# Altium PCB PCB_2021-06-30.pcbdoc
Units mil, origin at the board's own origin, x right, y up, seen from the top; angles counter-clockwise.
Board outline 3381.1 x 2940 mil, 2 copper layers (Top Layer, Bottom Layer); 30 components, 25 nets, 123 pads, 121 vias.
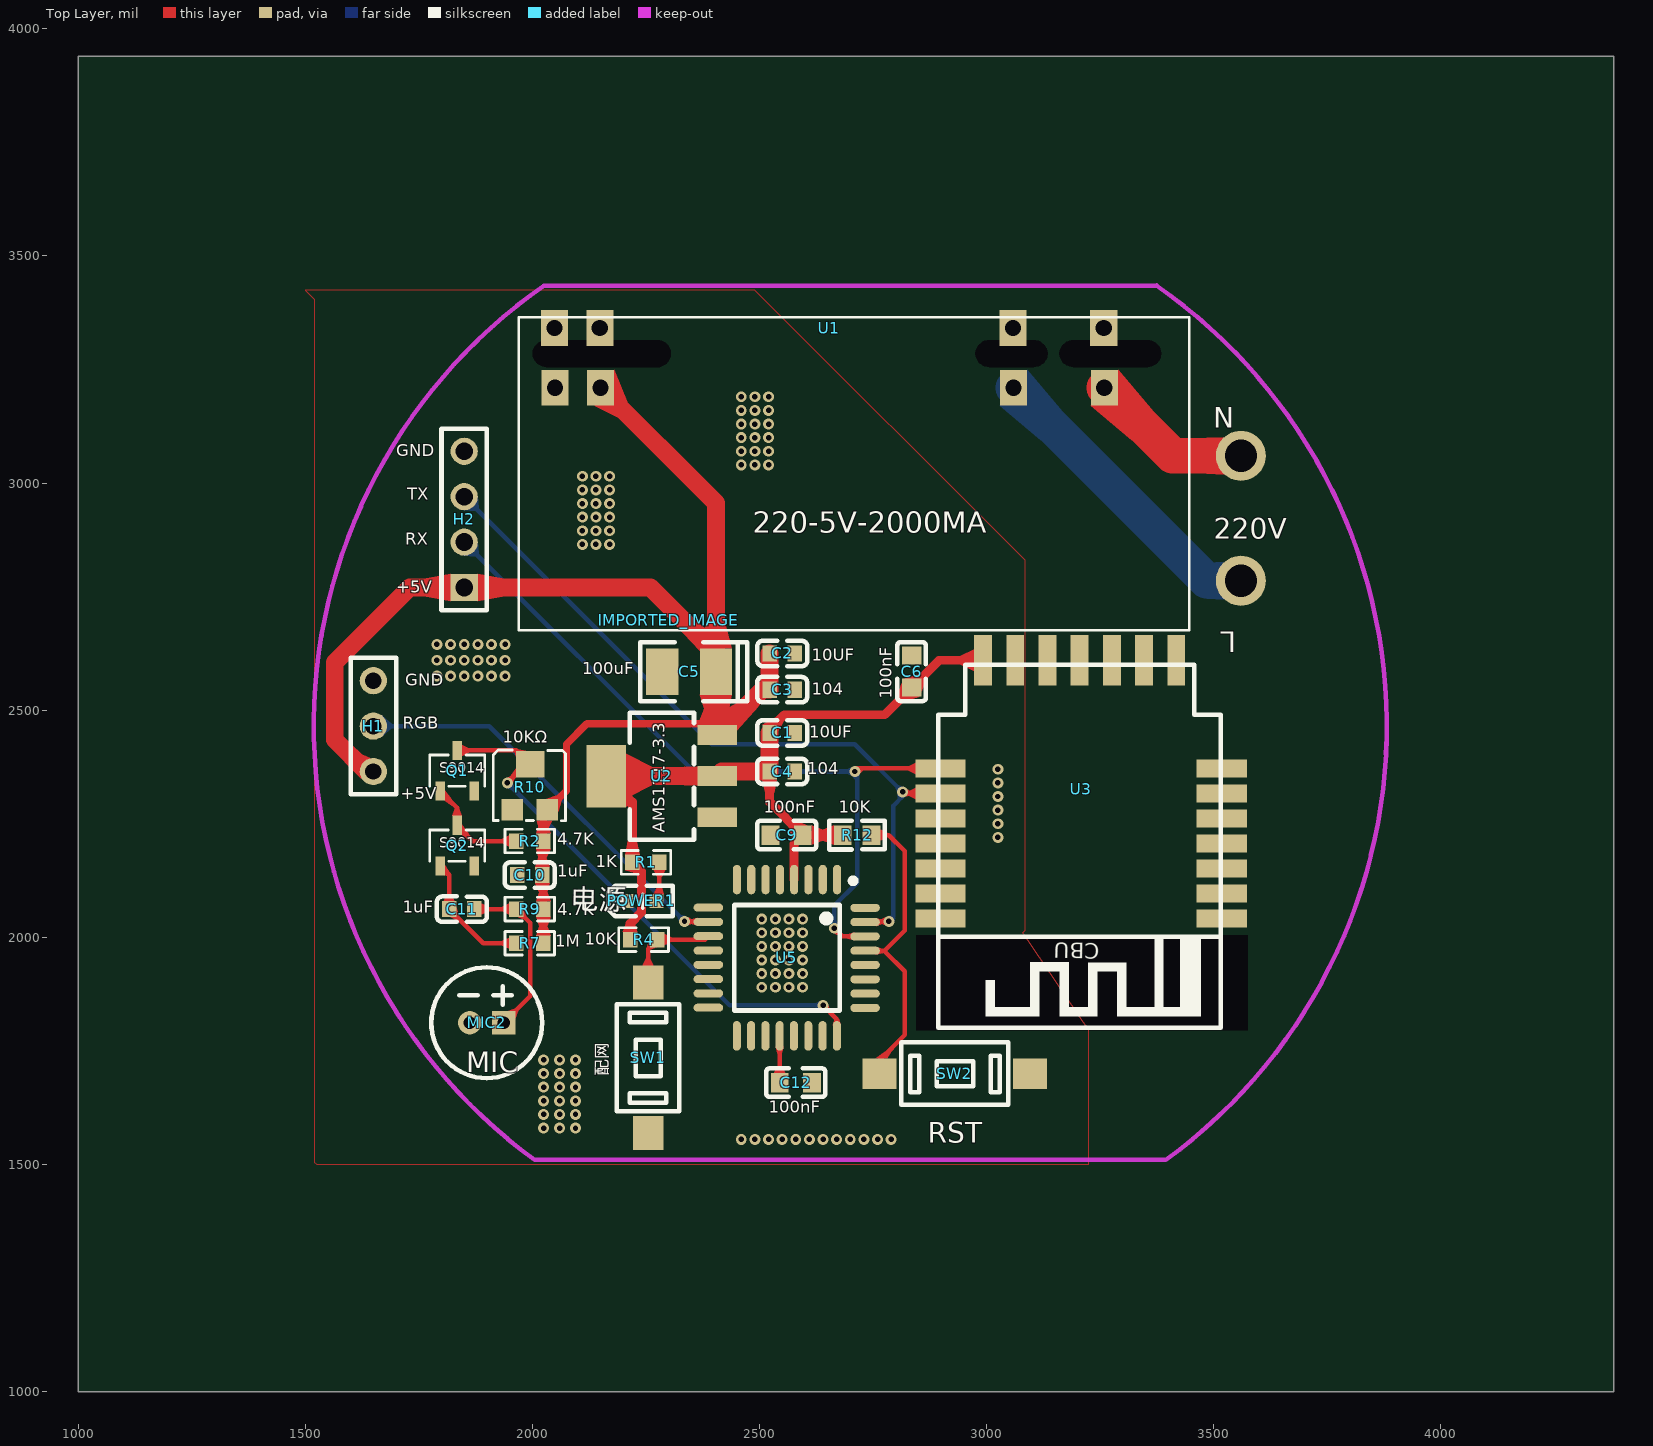
[diagram p0: Top Layer view]
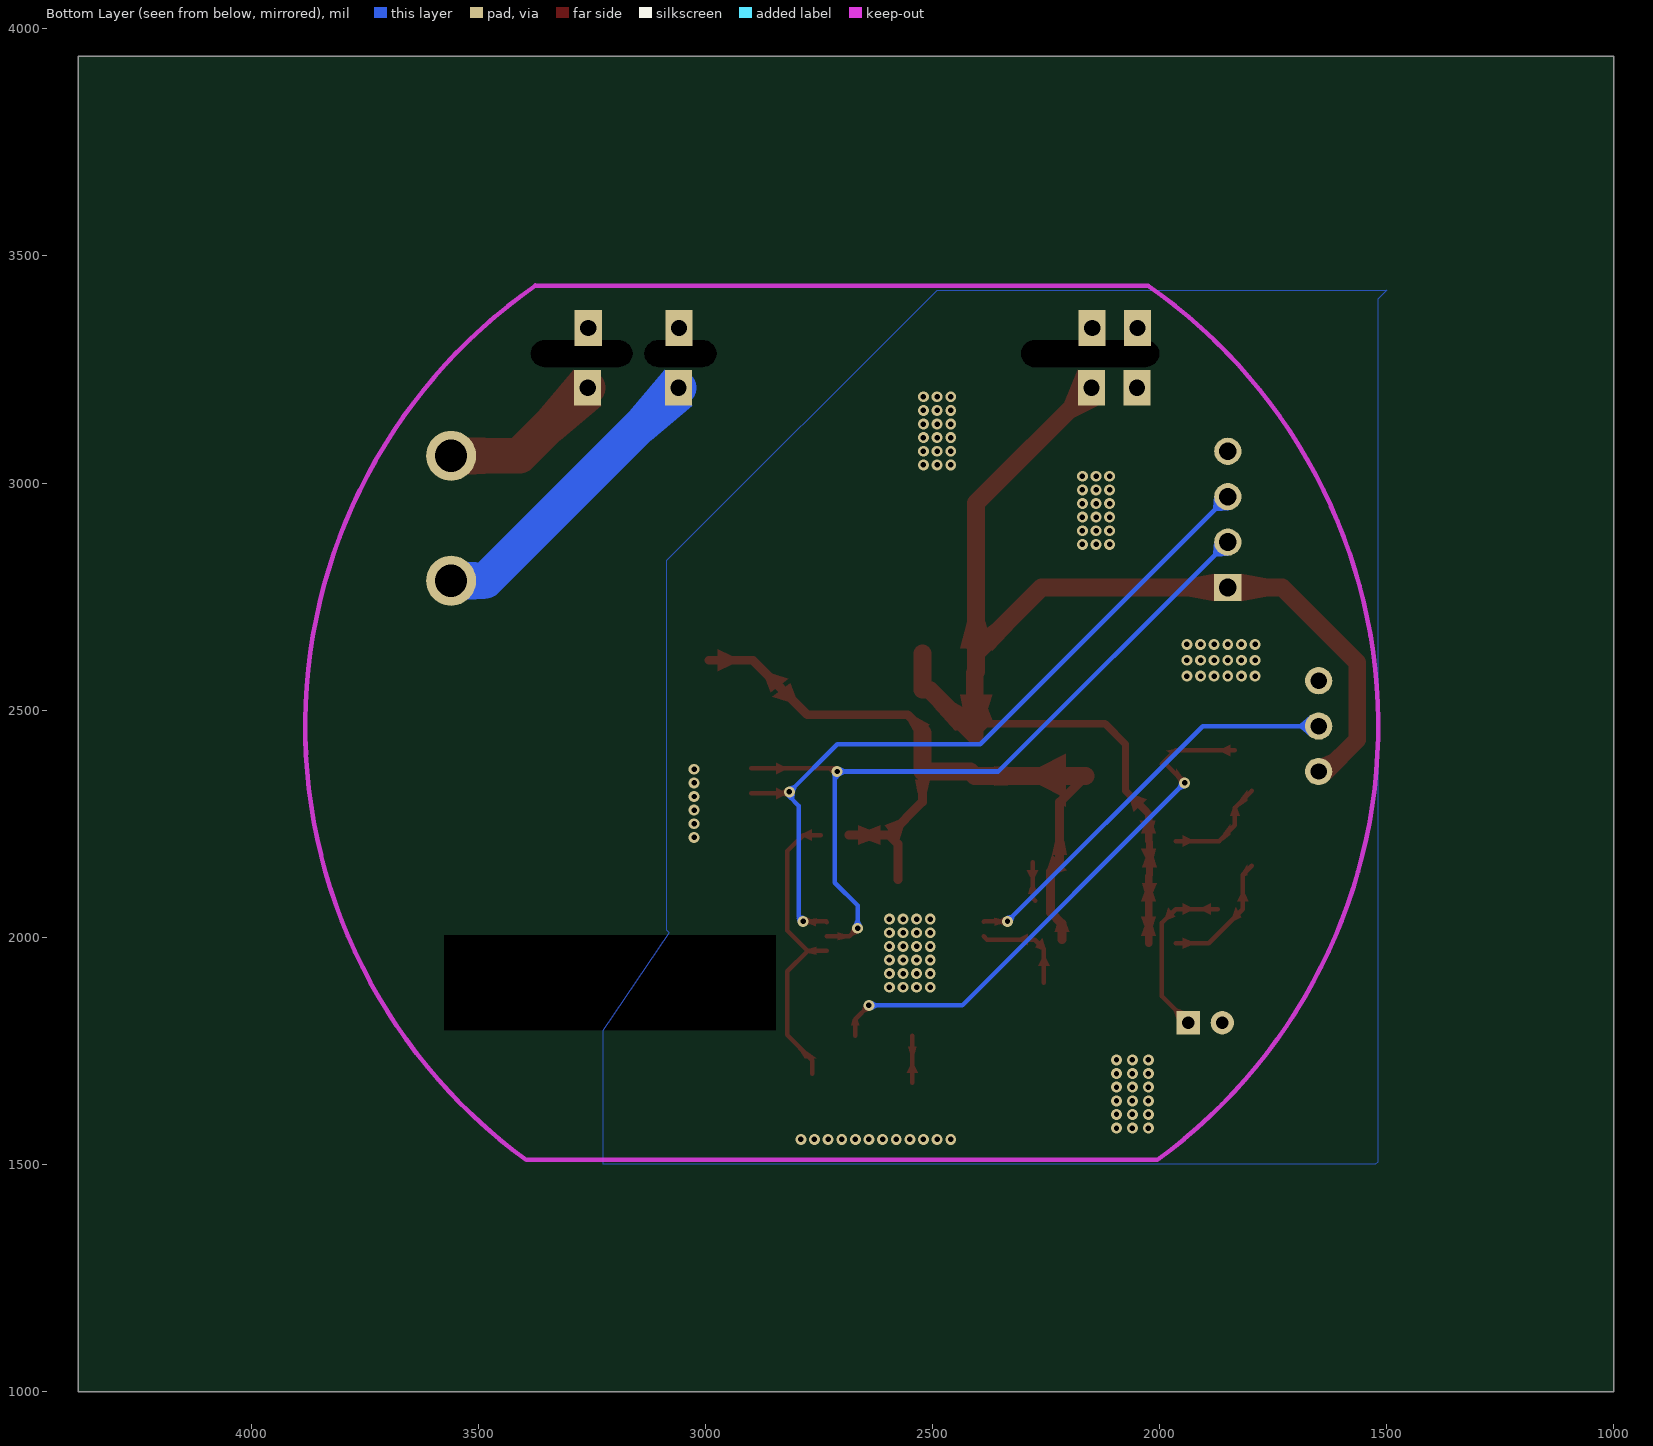
[diagram p1: Bottom Layer view, seen from below]

## Layer stack, top to bottom
Top Layer: signal copper (thickness not stored)
Dielectric: dielectric 12.6, FR-4, Dk 4.8
Bottom Layer: signal copper (thickness not stored)

## Board outline
4381.1,1000 1000,1000 1000,3940 4381.1,3940
cut-out: 2845,2005 2845,1795 3575,1795 3575,2005

## Components (designator, comment, footprint, x,y, rotation, side; value= is the part's Value field where it differs from the comment)
C1 "10UF" C0603#1 2550,2450 r180 top
C2 "10UF" C0603#1 2550,2625 r180 top
C3 "104" C0603#1 2550,2545 r0 top
C4 "104" C0603#1 2550,2365 r0 top
C5 "100uF" CAP-SMD_L3.5-W2.8 2345,2585 r180 top
C6 "100nF" C0603#2 2835,2585 r270 top
C9 "100nF" C0603#2 2560,2225 r0 top
C10 "1uF" C0603#1 1994.48,2136.93 r0 top
C11 "1uF" C0603#1 1844.48,2061.93 r180 top
C12 "100nF" C0603#2 2580,1680 r0 top
H1 "灶带接口" 2.54_3P 1600,2315 r90 top
H2 "调试接口" 4_2.54 1850,2970 r90 top
IMPORTED_IMAGE "IMPORTED_IMAGE" IMPORTED_IMAGE 2300.66,2698.39 r0 top
MIC2 "GMI6050P-60DB" MIC-TH_BD6.0-P1.90-D0.4-L-RD 1899.48,1811.93 r180 top
POWER1 "电源" LED0603-R-RD 2240,2080 r0 top
Q1 "S9014" SOT-23-3_L2.9-W1.6-P1.90-LS2.8-BR 1834.48,2366.93 r270 top
Q2 "S9014" SOT-23-3_L2.9-W1.6-P1.90-LS2.8-BR 1834.48,2201.93 r270 top
R1 "1K" R0603#1 2250,2165 r0 top
R2 "4.7K" R0603#1 1994.48,2211.93 r180 top
R4 "10K" R0603#1 2245,1995 r0 top
R7 "1M" R0603#1 1994.48,1986.93 r0 top
R9 "4.7K" R0603#1 1994.48,2061.93 r180 top
R10 "10KΩ" 10K贴片可调电阻 1994.48,2321.93 r0 top
R12 "10K" R0603#2 2715,2225 r180 top
SW1 "Wifi" KEY-TACT-SMD-6.0*3.5 2255,1735 r270 top
SW2 "RST" KEY-TACT-SMD-6.0*3.5 2930,1700 r0 top
U1 "wo-220-5V-2000MA" WO-220-5V-2000MA 1970,3365 r0 top
U2 "AMS1117-3.3" SOT-223-3_L6.5-W3.4-P2.30-LS7.0-BR 2285,2355 r0 top
U3 "CBU Wi-Fi&Bluetooth 模组" "CBU WIFI&BLUETOOTH" 3205,2610 r180 top
U5 "LGT8F328P-QFP32L" LGT8F328P-QFP32L 2560,1955 r270 top

## Footprints (in the part's own frame and the unit in brackets; to place one, negate y for a bottom-side part, rotate by r counter-clockwise, add the part's x,y. Pads: shape width x height; smd on the part's side, far side on the other; paste and mask are expansions set on the pad)
2.54_3P [mil]
  round 60 hole 36: 1(50,-50) 2(150,-50) 3(250,-50)
  silkscreen extent 0,-100 300,0
4_2.54 [mil]
  rect 60x60 hole 39.37: 1(-200,0)
  round 60 hole 39.37: 2(-100,0) 3(0,0) 4(100,0)
  silkscreen extent -250,-50 150,50
10K贴片可调电阻 [mm]
  rect 1.2x1.2 smd: 1(-0.98,-1.05) 3(0.98,-1.05)
  rect 1.6x1.5 smd: 2(0.026,1.5)
  silkscreen extent -2.04,-1.65 2,2.29
C0603#1 [mm]
  rect 0.8x0.9 smd: 1(-0.7,0) 2(0.7,0)
  silkscreen extent -1.41,-0.71 1.39,0.72
C0603#2 [mm]
  rect 1x1.1 smd: 1(-0.9,0) 2(0.9,0)
  silkscreen extent -1.65,-0.8 1.65,0.8
CAP-SMD_L3.5-W2.8 [mm]
  rect 1.8x2.6 smd: 1(-1.501,0) 2(1.501,0)
  silkscreen extent -3.26,-1.65 2.73,1.65
"CBU WIFI&BLUETOOTH" [mm]
  rect 2.8x1 smd: 1(-7.947,14.446) 2(-7.947,13.046) 3(-7.947,11.646) 4(-7.947,10.246) 5(-7.947,8.846) 6(-7.947,7.446) 7(-7.947,6.046) 15(7.773,6.046) 16(7.773,7.446) 17(7.773,8.846) 18(7.773,10.246) 19(7.773,11.646) 20(7.773,13.046) 21(7.773,14.446)
  rect 1x2.8 smd: 8(-5.4,0) 9(-3.6,0) 10(-1.8,0) 11(0,0) 12(1.8,0) 13(3.6,0) 14(5.4,0)
  silkscreen extent -7.9,0.25 7.9,20.55
IMPORTED_IMAGE [mil]
KEY-TACT-SMD-6.0*3.5 [mm]
  rect 1.9x1.7 smd: 1(-4.2,0) 2(4.2,0)
  silkscreen extent -3,-1.75 3,1.75
LED0603-R-RD [mm]
  rect 0.8x0.8 smd: 1(0.851,0) 2(-0.851,0)
  silkscreen extent -1.82,-0.86 1.77,0.86
LGT8F328P-QFP32L [mm]
  oval 1.65x0.45 smd: 1(-4.369,2.817) 2(-4.369,2.017) 3(-4.369,1.217) 4(-4.369,0.417) 5(-4.369,-0.381) 6(-4.369,-1.181) 7(-4.369,-1.981) 8(-4.369,-2.781) 17(4.369,-2.791) 18(4.369,-1.991) 19(4.369,-1.191) 20(4.369,-0.391) 21(4.369,0.406) 22(4.369,1.207) 23(4.369,2.007) 24(4.369,2.807)
  oval 0.45x1.65 smd: 9(-2.804,-4.382) 10(-2.004,-4.382) 11(-1.204,-4.381) 12(-0.404,-4.381) 13(0.394,-4.381) 14(1.194,-4.381) 15(1.994,-4.381) 16(2.794,-4.381) 25(2.804,4.382) 26(2.004,4.382) 27(1.204,4.381) 28(0.404,4.381) 29(-0.394,4.381) 30(-1.194,4.381) 31(-1.994,4.381) 32(-2.794,4.381)
  silkscreen extent -4.45,-2.94 2.95,3.86
MIC-TH_BD6.0-P1.90-D0.4-L-RD [mm]
  rect 1.3x1.3 hole 0.7: 1(-0.95,0)
  round 1.3 hole 0.7: 2(0.95,0)
  silkscreen extent -3.1,-3.1 3.1,3.1
R0603#1 [mil]
  rect 31.75x34.02 smd: 1(-29.66,0) 2(29.66,0)
  silkscreen extent -55,-26 55,26
R0603#2 [mil]
  rect 39.37x43.31 smd: 1(-31.49,0) 2(31.49,0)
  silkscreen extent -61,-31 61,32
SOT-23-3_L2.9-W1.6-P1.90-LS2.8-BR [mm]
  rect 1.07x0.532 smd: 1(1.135,-0.95) 2(1.135,0.95) 3(-1.135,0)
  silkscreen extent -0.88,-1.54 0.88,1.54
SOT-223-3_L6.5-W3.4-P2.30-LS7.0-BR [mm]
  rect 2.2x1.1 smd: 1(3.099,-2.3) 2(3.099,0) 3(3.099,2.3)
  rect 2.2x3.5 smd: 4(-3.099,0)
  silkscreen extent -1.8,-3.55 1.8,3.55
WO-220-5V-2000MA [mil]
  rect 60x78.74 hole 36: 1(1088.19,-23.62) 2(1288.19,-23.62) 3(178.74,-23.62) 4(78.74,-23.62)
  Multi-Layer board cut-out: 60,-50.47 300,-50.47 314.69,-51.64 327.05,-59.68 334.07,-72.63 334.07,-87.37 327.05,-100.32 314.69,-108.36 300,-109.53 300,-109.53 60,-109.53 47.19,-106.6 36.91,-98.41 31.21,-86.57 31.21,-73.43 36.91,-61.59 47.19,-53.4 60,-50.47 60,-50.47
  Multi-Layer board cut-out: 1035,-50.47 1135,-50.47 1147.81,-53.4 1158.09,-61.59 1163.79,-73.43 1163.79,-86.57 1158.09,-98.41 1147.81,-106.6 1135,-109.53 1135,-109.53 1035,-109.53 1022.19,-106.6 1011.91,-98.41 1006.21,-86.57 1006.21,-73.43 1011.91,-61.59 1022.19,-53.4 1035,-50.47 1035,-50.47
  Multi-Layer board cut-out: 1220,-50.47 1385,-50.47 1397.81,-53.4 1408.09,-61.59 1413.79,-73.43 1413.79,-86.57 1408.09,-98.41 1397.81,-106.6 1385,-109.53 1385,-109.53 1220,-109.53 1207.19,-106.6 1196.91,-98.41 1191.21,-86.57 1191.21,-73.43 1196.91,-61.59 1207.19,-53.4 1220,-50.47 1220,-50.47
  silkscreen extent 0,-689 1476,0

## Free pads (board coordinates)
  rect 60x78.74 hole 36: 1(3059.45,3210) 2(3259.45,3210) 3(2150,3210) 4(2050,3210)
  round 110.24 hole 70.87: 1(3560,2785) 1(3560,3060)

## Via types
v1: diameter 24, hole 12, Top Layer to Bottom Layer, 121 vias

## Nets (pads, with @x,y where several pads share a name; then routed paths per layer and width w, separated by ;. In a path a pad name is that pad's centre, name@x,y a point inside that pad or via, vN(x,y) a via of type N, cw(c..) or ccw(c..) an arc to the next point about the centre after c; other vN are vias at no path point)
3.3V: C1.2 C4.1 C6.2 C9.2 R1.1 R4.1 R12.2 U2.2 U2.4 U3.14 U5.4 | length 1755.5
  Top Layer w19.68: U2.4 2220.3,2297.7 R1.1 2240,2145.3 2240,2055 2215.3,2030.3 R4.1 ; C4.1 2522.4,2298 C9.2 ; C1.2 2522.4,2457.4 2555,2490 2775.4,2490 C6.2 2895.4,2610 U3.14 ; U5.4 2576.4,2206 C9.2 ; R12.2 C9.2
  Top Layer w39.37: U2.4 U2.2 2417,2365 C4.1 C1.2
+5V: C2.2 C3.1 C5.1 C10.2 H1.1 H2.1 pad.3 R2.1 R7.2 R9.1 R10.3 U1.3 U2.3 | length 3221.3
  Top Layer w15.75: R7.2 R9.1 2024.1,2134.8 C10.2 2022,2209.8 R2.1 2024.1,2271.7 R10.3 2075,2322.5 2075,2425 2120,2470 2382.5,2470 U2.3@2407,2445.5
  Top Layer w39.37: H1.1 1635,2365 1565,2435 1565,2605 1730,2770 H2.1 2260,2770 2404.1,2625.9 C5.1 ; pad.3 2404.1,2955.9 C5.1 ; C2.2 C3.1 2506.5,2545 2407,2445.5 2407,2582.1 C5.1
ACL: pad.1@3059.45,3210 pad.1@3560,2785 U1.1 | length 676.6
  Bottom Layer w78.74: pad.1@3059.5,3210 3484.4,2785 pad.1@3560,2785
ACN: pad.1@3560,3060 pad.2 U1.2 | length 362.6
  Top Layer w78.74: pad.2@3259.5,3210 3409.5,3060 pad.1@3560,3060
C11_1: C11.1 MIC2.1 R9.2 | length 379.3
  Top Layer w10: C11.1 R9.2 1995,2031.7 1995,1870.1 MIC2.1
C11_2: C11.2 Q2.1 R7.1 | length 282.5
  Top Layer w10: Q2.1 1816.9,2137.4 C11.2 1891.9,1986.9 R7.1
C12_1: C12.1 U5.20 | length 103
  Top Layer w10: C12.1 U5.20
GND: C1.1 C2.1 C3.2 C4.2 C5.2 C6.1 C9.1 C10.1 C12.2 H1.3 H2.4 MIC2.2 pad.4 POWER1.2 Q1.2 Q2.2 R10.1 SW1.2 SW2.2 U1.4 U2.1 U3.13 U5.5
  other v1: 2460,1555 2490,1555 2520,1555 2550,1555 2580,1555 2610,1555 2640,1555 2670,1555 2700,1555 2730,1555 2760,1555 2790,1555 2025,1580 2060,1580 2095,1580 2025,1610 2060,1610 2095,1610 2025,1640 2060,1640 2095,1640 2025,1670 2060,1670 2095,1670 2025,1700 2060,1700 2095,1700 2025,1730 2060,1730 2095,1730 2505,1890 2535,1890 2565,1890 2595,1890 2505,1920 2535,1920 2565,1920 2595,1920 2505,1950 2535,1950 2565,1950 2595,1950 2505,1980 2535,1980 2565,1980 2595,1980 2505,2010 2535,2010 2565,2010 2595,2010 2505,2040 2535,2040 2565,2040 2595,2040 3025,2220 3025,2250 3025,2280 3025,2310 3025,2340 3025,2370 1790,2575 1820,2575 1850,2575 1880,2575 1910,2575 1940,2575 1790,2610 1820,2610 1850,2610 1880,2610 1910,2610 1940,2610 1790,2645 1820,2645 1850,2645 1880,2645 1910,2645 1940,2645 2110,2865 2140,2865 2170,2865 2110,2895 2140,2895 2170,2895 2110,2925 2140,2925 2170,2925 2110,2955 2140,2955 2170,2955 2110,2985 2140,2985 2170,2985 2110,3015 2140,3015 2170,3015 2460,3040 2490,3040 2520,3040 2460,3070 2490,3070 2520,3070 2460,3100 2490,3100 2520,3100 2460,3130 2490,3130 2520,3130 2460,3160 2490,3160 2520,3160 2460,3190 2490,3190 2520,3190
MIC: Q1.3 R10.2 U5.24 | length 1218.8
  Top Layer w10: Q1.3 1964.9,2411.6 R10.2 1986,2381 v1(1945,2340) ; v1(2640,1850) 2670.5,1819.5 U5.24
  Bottom Layer w10: v1(1945,2340) 2435,1850 v1(2640,1850)
Q1_1: Q1.1 Q2.3 R2.2 | length 235.8
  Top Layer w10: Q1.1 1834.5,2284.8 Q2.3 1869.2,2211.9 R2.2
R1_2: POWER1.1 R1.2 | length 87.6
  Top Layer w10: POWER1.1 2279.7,2086.2 R1.2
RGB: H1.2 U5.10 | length 916.1
  Top Layer w10: v1(2335,2035) 2386.4,2035 U5.10
  Bottom Layer w10: H1.2 1905,2465 v1(2335,2035)
RST: R12.1 SW2.1 U5.29 | length 680.7
  Top Layer w10: U5.29 2775,1970 ; R12.1 2785,2225 2820,2190 2820,2015 2775,1970 ; SW2.1@2764.7,1700 2764.7,1729.7 2820,1785 2820,1925 2775,1970
RXD: H2.2 U3.15 U5.30 | length 1703.8
  Top Layer w10: v1(2665,2020) 2683,2002 U5.30 ; v1(2710,2365) 2717,2372 U3.15
  Bottom Layer w10: H2.2 2355,2365 v1(2710,2365) 2715,2360 2715,2120 2665,2070 v1(2665,2020)
S$21: 
S$23: 
S$24: 
S$27: 
S$29: 
S$68: 
S$1127: 
S$1350: 
S$1354: 
TXD: H2.3 U3.16 U5.31 | length 1670.1
  Top Layer w10: U5.31 2734,2035 v1(2785,2035) ; v1(2815,2320) 2818.2,2316.8 U3.16
  Bottom Layer w10: H2.3 2395,2425 2675,2425 2710,2425 v1(2815,2320) 2815,2310 2795,2290 2795,2045 v1(2785,2035)
WIFI_RESET: R4.2 SW1.1 U5.11 | length 218.7
  Top Layer w10: SW1.1@2255,1900.3 2255,1975.3 R4.2 2380.1,1995 U5.11
pads on no net: U3.1 U3.2 U3.3 U3.4 U3.5 U3.6 U3.7 U3.8 U3.9 U3.10 U3.11 U3.12 U3.17 U3.18 U3.19 U3.20 U3.21 U5.1 U5.2 U5.3 U5.6 U5.7 U5.8 U5.9 U5.12 U5.13 U5.14 U5.15 U5.16 U5.17 U5.18 U5.19 U5.21 U5.22 U5.23 U5.25 U5.26 U5.27 U5.28 U5.32

## Polygon pours and split planes (outlines as drawn)
GND on Bottom Layer (solid): 3080,2010 3085,2015 3085,2830 2490,3425 1500,3425 1520,3405 1520,1505 1525,1500 2890,1500 3225,1500 3225,1795
GND on Top Layer (solid): 3080,2010 3085,2015 3085,2830 2490,3425 1500,3425 1520,3405 1520,1505 1525,1500 2890,1500 3225,1500 3225,1795

## Keep-outs
Keep-Out Layer:
  lines w10 net S$1127: 2005.01,1510.02 cw(c2700,2465) 2025.37,3434.47 ; 3374.63,3434.47 cw(c2700,2465) 3394.99,1510.02

## Other copper
Top Layer:
  region net +5V: 1644.04,2394.4 1621.57,2355.41 1604.43,2367.73 1624.79,2403.05
  region net ACN: 3523.54,3018.66 3523.54,3101.34 3484.96,3099.37 3484.96,3020.63
  region net MIC: 1956.98,2339.25 1944.25,2351.98 1953.02,2355.09 1960.09,2348.02
  region net MIC: 2651.98,1850.75 2639.25,1838.02 2648.02,1834.91 2655.09,1841.98
  region net RGB: 2342.94,2026 2342.94,2044 2351.34,2040 2351.34,2030
  region net TXD: 2824.55,2327.27 2821.02,2309.62 2830.02,2311.8 2832.02,2321.8
  region net TXD: 2777.06,2026 2777.06,2044 2768.66,2040 2768.66,2030
  region net RXD: 2721.03,2360.27 2713.32,2376.53 2722.39,2377 2727.13,2367
  region net RXD: 2676.98,2020.75 2664.25,2008.02 2673.02,2004.91 2680.09,2011.98
  region net +5V: 2037.78,2119.21 2006.29,2119.21 2016.26,2095.59 2032.01,2095.59
  region net +5V: 2006.29,2154.65 2037.78,2154.65 2029.91,2178.27 2014.16,2178.27
  region net C11_2: 1832.67,2065.98 1820.37,2044.21 1833.98,2037.8 1839.08,2046.83
  region net C11_2: 1804.42,2079.65 1829.42,2079.65 1821.92,2094.65 1811.92,2094.65
  region net C11_1: 1887.78,2074.43 1887.78,2049.43 1902.78,2056.93 1902.78,2066.93
  region net C11_1: 1944.79,1837.52 1962.47,1819.85 1967.77,1835.75 1960.7,1842.82
  region net Q1_1: 1807.55,2301.18 1807.55,2324.27 1822.55,2303.84 1822.55,2289.7
  region net MIC: 1844.95,2399.11 1844.95,2424.11 1859.95,2416.61 1859.95,2406.61
  region net C11_2: 1807.55,2136.18 1807.55,2159.27 1816.92,2144.47 1813.38,2133.87
  region net Q1_1: 1844.95,2225.55 1844.95,2248.64 1859.95,2228.21 1859.95,2214.07
  region net Q1_1: 1844.95,2267.68 1824,2267.68 1829.48,2282.68 1839.48,2282.68
  region net Q1_1: 1948.95,2199.43 1948.95,2224.43 1933.95,2216.93 1933.95,2206.93
  region net +5V: 2008.26,2194.92 2040.01,2194.92 2029.91,2171.3 2014.16,2171.3
  region net +5V: 2040.01,2228.94 2008.26,2228.94 2016.26,2252.56 2032.01,2252.56
  region net +5V: 2008.26,2003.94 2040.01,2003.94 2032.01,2027.56 2016.26,2027.56
  region net C11_2: 1948.95,1999.43 1948.95,1974.43 1933.95,1981.93 1933.95,1991.93
  region net C11_1: 1980.7,2065.17 1966.03,2044.92 1980.44,2039.24 1986.38,2047.44
  region net C11_1: 1948.95,2049.43 1948.95,2074.43 1933.95,2066.93 1933.95,2056.93
  region net +5V: 2008.26,2044.92 2040.01,2044.92 2032.01,2021.3 2016.26,2021.3
  region net +5V: 2040.01,2078.94 2008.26,2078.94 2016.26,2102.56 2032.01,2102.56
  region net MIC: 1964,2398.25 1985.79,2410.51 1969.4,2414.16 1961.34,2408.08
  region net MIC: 1964,2351.46 1964,2371.5 1949,2351.07 1949,2336.93
  region net +5V: 2043.82,2256.97 2009.42,2256.97 2016.26,2233.35 2032.01,2233.35
  region net +5V: 2028.84,2304.21 2056.66,2276.36 2065.01,2301.42 2053.88,2312.56
  region net R1_2: 2267.2,2095.75 2289.25,2095.75 2284.7,2110.75 2274.7,2110.75
  region net 3.3V: 2506.69,2467.72 2538.19,2448.06 2552.72,2473.8 2535.58,2484.5
  region net 3.3V: 2538.19,2347.28 2506.69,2347.28 2512.56,2317.76 2532.24,2317.76
  region net WIFI_RESET: 2242.5,1937.75 2267.5,1937.75 2260,1952.75 2250,1952.75
  region net RST: 2755.96,1733.46 2780.96,1733.46 2790.54,1748.46 2776.39,1748.46
  region net C12_1: 2532.1,1701.65 2557.1,1701.65 2549.6,1716.65 2539.6,1716.65
  region net 3.3V: 2575.75,2207.25 2605.24,2246.65 2576.62,2257.7 2564.71,2241.77
  region net 3.3V: 2615.12,2246.65 2615.12,2203.35 2644.65,2215.16 2644.65,2234.84
  region net 3.3V: 2852.6,2529.88 2813.35,2559.56 2802.34,2530.86 2818.2,2518.88
  region net 3.3V: 2817.25,2569.25 2856.65,2539.76 2867.7,2568.38 2851.77,2580.29
  region net 3.3V: 2972.72,2585.39 2972.72,2634.61 2943.19,2619.84 2943.19,2600.16
  region net RXD: 2843.88,2359.5 2843.88,2384.5 2828.88,2377 2828.88,2367
  region net TXD: 2843.88,2304.3 2843.88,2329.3 2828.88,2321.8 2828.88,2311.8
  region net WIFI_RESET: 2290.53,2007.5 2290.53,1982.5 2305.53,1990 2305.53,2000
  region net WIFI_RESET: 2273.57,1977.99 2258.78,1998.15 2253.13,1980.5 2259.11,1972.34
  region net 3.3V: 2231.22,2012.01 2199.47,2012.01 2205.46,2030.3 2225.14,2030.3
  region net R1_2: 2292.2,2147.99 2267.2,2147.99 2274.7,2132.99 2284.7,2132.99
  region net 3.3V: 2236.22,2182.01 2204.47,2182.01 2210.46,2211.53 2230.14,2211.53
  region net 3.3V: 2236.22,2182.01 2204.47,2147.99 2233.04,2138.34 2246.72,2152.5
  region net 3.3V: 2663.82,2203.35 2663.82,2246.65 2634.29,2234.84 2634.29,2215.16
  region net RST: 2766.18,2237.5 2766.18,2212.5 2781.18,2220 2781.18,2230
  region net +5V: 2368.67,2636.18 2439.53,2636.18 2423.78,2695.23 2384.41,2695.23
  region net +5V: 2368.67,2631.19 2439.53,2636.18 2367.52,2690.31 2315.51,2686.65
  region net +5V: 2439.53,2533.82 2368.67,2533.82 2387.31,2474.77 2426.68,2474.77
  region net 3.3V: 2206.31,2404.21 2206.31,2305.79 2265.36,2335.32 2265.36,2374.68
  region net 3.3V: 2206.31,2336.3 2206.31,2287.09 2213.34,2290.74 2220.3,2311.62
  region net +5V: 2365.66,2467.2 2385.3,2467.2 2393.68,2470 2405.03,2467.2 2385.3,2467.2 2376.98,2464.43 2365.66,2467.2
  region net +5V: 2363.69,2467.2 2450.31,2467.2 2426.68,2526.26 2387.31,2526.26
  region net +5V: 2363.69,2467.2 2450.31,2454.89 2497.21,2507.87 2448.46,2514.8
  region net 3.3V: 2363.69,2333.35 2363.69,2376.65 2304.64,2374.68 2304.64,2335.32
  region net +5V: 1880,2800 1880,2740 1939.06,2750.32 1939.06,2789.68
  region net +5V: 1820,2740 1820,2800 1760.94,2789.68 1760.94,2750.32
  region net ACN: 3289.45,3249.37 3229.45,3170.63 3319.67,3094.15 3367.83,3157.35
  region net +5V: 2180,3249.37 2136.24,3170.63 2188.7,3143.46 2208.59,3179.25
  region net TXD: 2757.01,2024.69 2755.24,2042.32 2770.55,2040 2771.55,2030
  region net RXD: 2708.88,1993.14 2708.88,2010.86 2693.88,2007 2693.88,1997
  region net RST: 2756.39,1979.35 2755.85,1961.65 2770.96,1965.05 2771.27,1975.04
  region net MIC: 2679.36,1806.62 2661.64,1806.62 2665.5,1819.5 2675.5,1819.5
  region net C12_1: 2553.46,1759.38 2535.74,1759.38 2539.6,1744.38 2549.6,1744.38
  region net RGB: 2364.53,2042.73 2363.23,2025.06 2348.55,2030 2349.29,2040
Bottom Layer:
  region net RXD: 1848.12,2840.06 1879.94,2871.88 1882.42,2844.66 1875.34,2837.58
  region net TXD: 1848.12,2940.06 1879.94,2971.88 1882.42,2944.66 1875.34,2937.58
  region net RGB: 1669.84,2442.5 1669.84,2487.5 1690.84,2470 1690.84,2460
  region net ACL: 3523.54,2743.66 3523.54,2826.34 3484.96,2824.37 3484.96,2745.63
  region net MIC: 1956.98,2340.75 1944.25,2328.02 1953.02,2324.91 1960.09,2331.98
  region net MIC: 2632.06,1841 2632.06,1859 2623.66,1855 2623.66,1845
  region net RGB: 2335.75,2046.98 2323.02,2034.25 2319.91,2043.02 2326.98,2050.09
  region net TXD: 2815.75,2331.98 2803.02,2319.25 2799.91,2328.02 2806.98,2335.09
  region net TXD: 2820.86,2309.53 2803.88,2315.49 2804.35,2306.42 2814.82,2302.75
  region net TXD: 2796.98,2034.25 2784.25,2046.98 2791.46,2048.54 2798.54,2041.46
  region net RXD: 2702.06,2356 2702.06,2374 2693.66,2370 2693.66,2360
  region net RXD: 2703.86,2354.69 2721,2360.2 2720,2351.05 2710,2347.84
  region net RXD: 2656,2027.94 2674,2027.94 2670,2036.34 2660,2036.34
  region net ACL: 3089.45,3249.37 3029.45,3170.63 3119.66,3094.14 3167.82,3157.34

## Silkscreen, mask and mechanical layers (free items; w line width, h text height)
Top Overlay:
  text "N" at 3545,3167.5 h45 r180
  text "GND" at 1700,3050 h45
  text "TX" at 1725,2955 h45
  text "220V" at 3500,2877.5 h45
  text "RX" at 1720,2855 h45
  text "+5V" at 1700,2750 h45
  text "L" at 3550,2672.5 h45 r180
  text "GND" at 1720,2545 h45
  text "RGB" at 1715,2450 h45
  text "+5V" at 1710,2295 h45
  text "MIC" at 1855,1702.5 h45
  text "配网" at 2175,1695 h45 r90

## Text inside footprints (layer, text, board x,y; h text height)
U1: Top Overlay "220-5V-2000MA" at 2485,2875 h80
U3: Top Overlay "CBU" at 3248.78,1998.93 h59.05 r179